# Altium PCB Micromouse_PCB_Final.PcbDoc (part 2 of 2)
Units mm, origin at the board's own origin, x right, y up, seen from the top; angles counter-clockwise.
Board outline 84.99 x 89.99 mm, 4 copper layers (Top Layer, Mid Layer (GND), Mid Layer (PWR), Bottom Layer), stack 1.591 mm thick; 98 components, 75 nets, 333 pads, 159 vias.
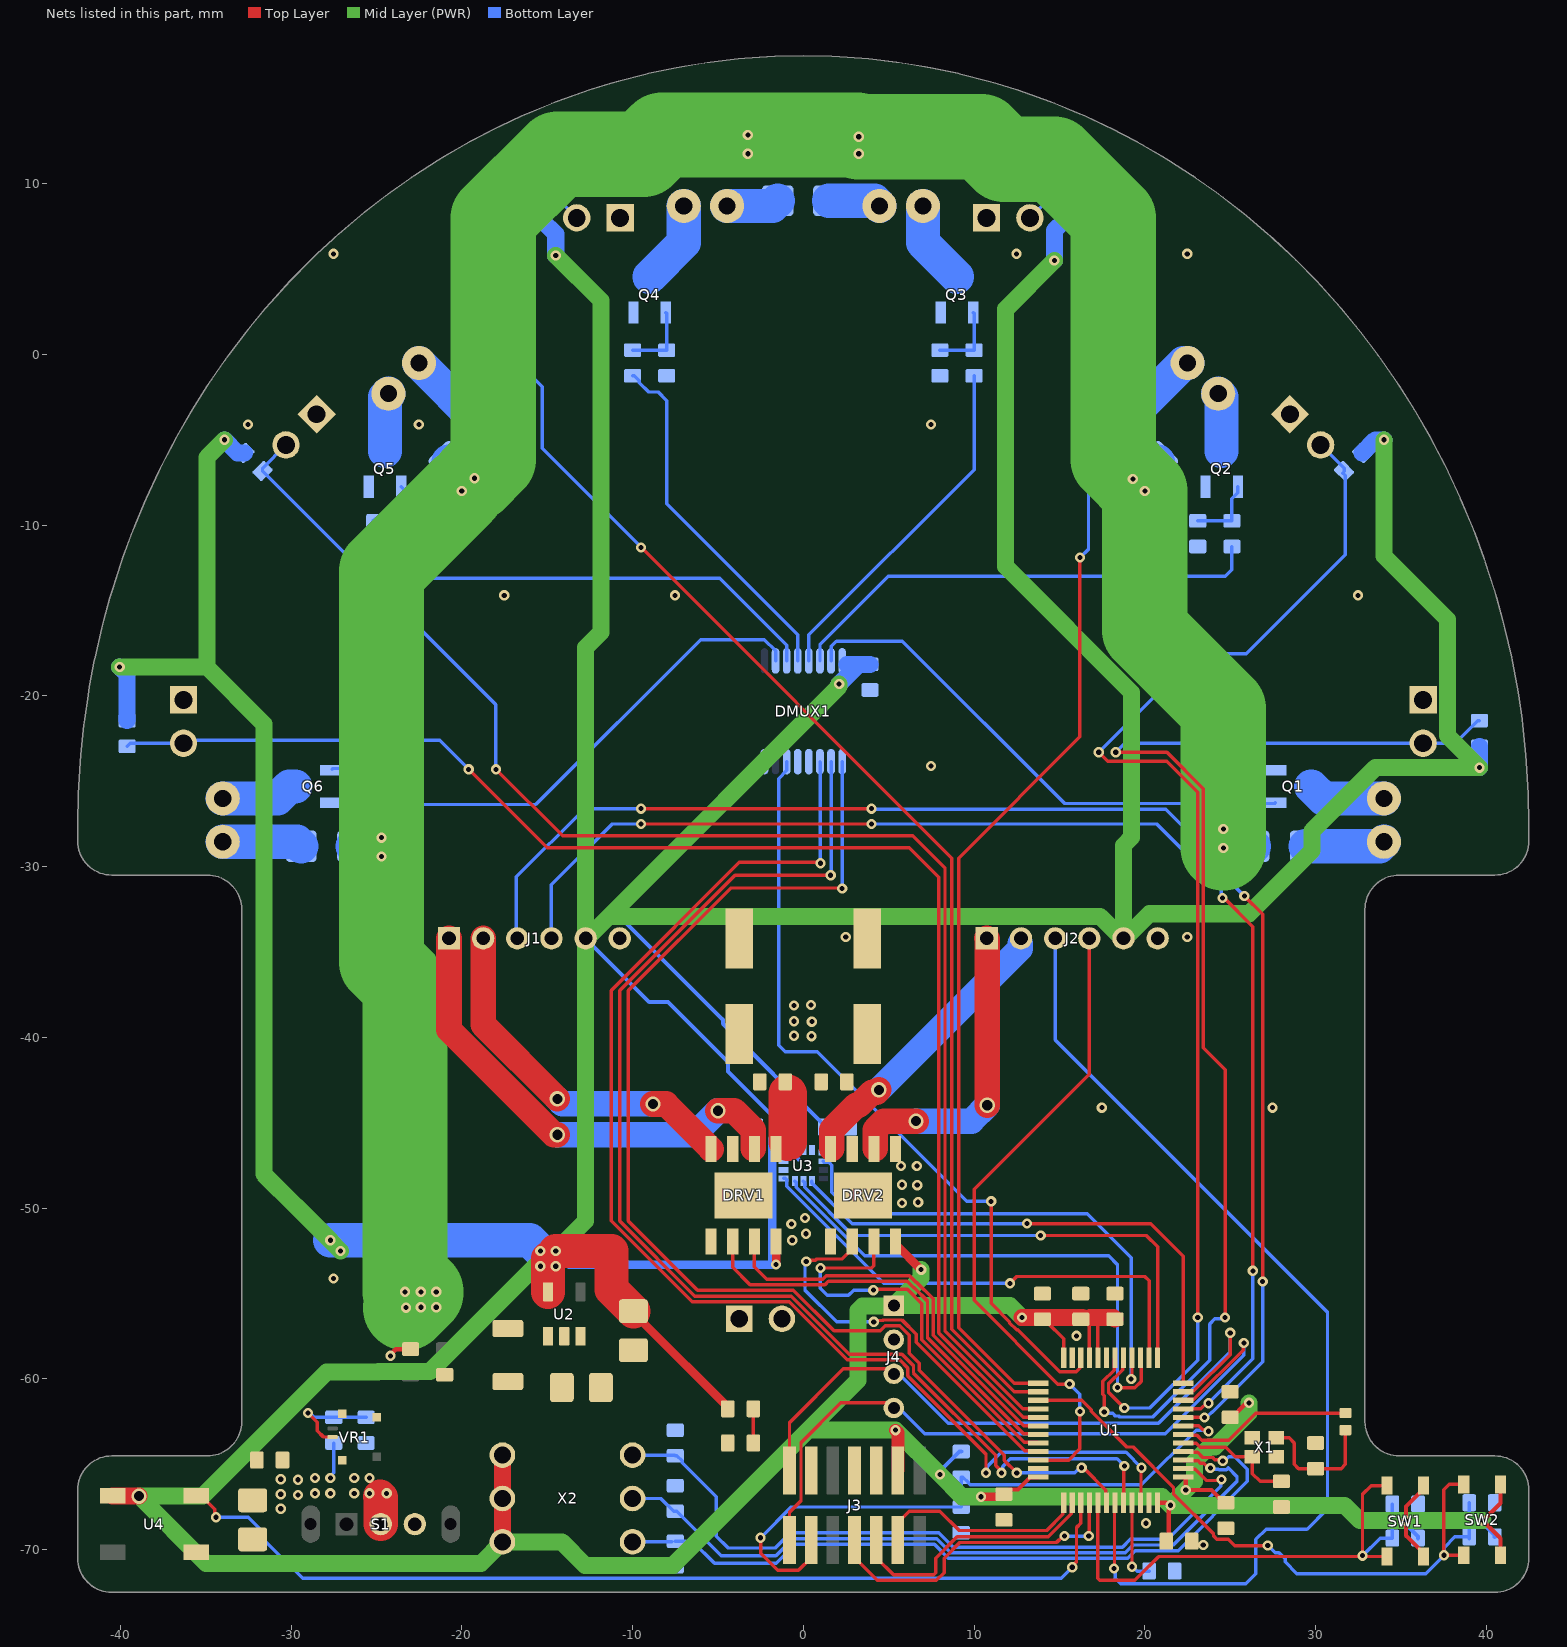
[diagram p4: the nets of this part, all layers, seen from the top]

## Via types
v1: diameter 0.6, hole 0.3, Top Layer to Bottom Layer, tented both sides, 151 vias
v2: diameter 0.9, hole 0.6, Top Layer to Bottom Layer, tented both sides, 8 vias

## Nets (pads, with @x,y where several pads share a name; then routed paths per layer and width w, separated by ;. In a path a pad name is that pad's centre, name@x,y a point inside that pad or via, vN(x,y) a via of type N, cw(c..) or ccw(c..) an arc to the next point about the centre after c; other vN are vias at no path point) (continued)
+3v3: C1.2 C2.2 C3.2 C4.2 C5.2 C6.2 C7.2 C15.2 C16.2 C21.1 C22.1 C23.1 C24.1 DMUX1.16 DRV1.4 DRV2.4 J1.5 J2.5 J3.3 J4.1 R3.1 R8.2 R27.2 R28.2 R29.2 R30.2 R31.2 R32.2 SW1.B1 SW1.B2 SW2.B1 SW2.B2 U1.1 U1.20 U1.21 U1.24 U1.36 U1.48 U2.5 U3.5 U3.8 U4.1 X2.1 X2.3 X2.5 | length 565.6
  Top Layer w0.2: v1(12.8,-56.4) 12.817,-56.4 13.117,-56.7 14.3,-56.7 15.25,-57.65 U1.24@15.25,-58.75 ; C3.2@16.35,-56.5 16.75,-56.9 U1.21@16.75,-58.75 ; 16.8,-56.4 17.25,-56.85 U1.20@17.25,-58.75
  Top Layer w0.25: C5.2@11.75,-66.75 12.025,-66.475 12.575,-66.475 13.3,-65.75 U1.36@13.75,-65.75 ; U1.48@20.75,-67.25 21.255,-67.25 21.405,-67.4 v1(21.5,-67.4) 21.433,-67.467 21.433,-67.688 21.4,-67.721 21.4,-69.35 C6.2@21.25,-69.5 ; U1.1@22.25,-65.75 22.375,-65.75 22.4,-65.775 v1(22.4,-66.5) 23.9,-66.5 24.65,-67.25 C7.2@24.75,-67.25 ; C1.2@25,-62.25 25.1,-62.25 25.883,-61.467 26.033,-61.467 v1(26.1,-61.4) ; SW1.B1@36.325,-70.4 36.325,-70.2 35.3,-69.175 v1(35.3,-68.3) 35.3,-67.475 36.325,-66.45 SW1.B2@36.325,-66.25 ; SW2.B1@40.825,-70.325 40.825,-69.325 v1(39.8,-68.3) 40.825,-67.275 SW2.B2@40.825,-66.175
  Top Layer w0.5: C15.2@-9.95,-56.032 -9.8,-56.032 -9.35,-56.482 -9.35,-56.725 -4.425,-61.65 R8.2@-4.425,-61.75 ; v1(-1.6,-53.3) -1.595,-53.295 DRV1.4@-1.595,-51.962 ; DRV2.4@5.405,-51.962 5.405,-52.105 v1(6.9,-53.6) ; v1(10.4,-66.9) 11.6,-66.9 C5.2@11.75,-66.75
  Top Layer w0.75: v1(5.4,-63) 5.54,-63.14 J3.3@5.54,-65.365
  Top Layer w1: U4.1@-40.44,-66.86 v2(-38.906,-66.86) ; X2.5@-17.62,-69.54 X2.3@-17.62,-67 X2.1@-17.62,-64.46 ; -14.95,-52.95 -14.757,-52.757 ; v1@12.817,-56.4 C3.2@16.35,-56.4 ; 16.8,-56.4 18.15,-56.4 C4.2@18.25,-56.5
  Top Layer w2: U2.5@-14.95,-54.9 -14.95,-52.95 ; v1(-14.5,-52.5) -11.225,-52.5 -11.225,-54.757 C15.2@-9.95,-56.032
  Mid Layer (PWR) w1: v1(-40.036,-18.303) -34.928,-18.303 ; v1(-33.9,-5) -34.928,-6.028 -34.928,-18.303 ; v1(-27.1,-52.5) -27.7,-51.9 v1(-27.7,-51.875) -29.634,-49.941 -29.659,-49.941 -31.593,-48.007 -31.593,-21.638 -34.928,-18.303 ; v1(-15.4,-53.4) -15.7,-53.4 -21.873,-59.573 -24.884,-59.573 -24.909,-59.598 -27.909,-59.598 -35.171,-66.86 v2(-38.906,-66.86) -34.966,-70.8 -18.88,-70.8 X2.5@-17.62,-69.54 -14.146,-69.54 -12.769,-70.917 -7.643,-70.917 0.274,-63 ; v1(-14.5,-52.5) -12.75,-50.75 J1.5@-12.75,-34.2 ; v1(-14.5,5.8) -11.85,3.15 -11.85,-16.272 -12.75,-17.172 J1.5@-12.75,-34.2 ; v1(2.1,-19.3) 2.1,-19.433 -11.386,-32.919 ; v1(6.9,-53.6) 6.9,-54.1 J4.1@5.3,-55.7 ; v1(12.8,-56.4) 12.1,-55.7 J4.1@5.3,-55.7 ; v1(14.7,5.5) 11.85,2.65 11.85,-12.422 19.227,-19.799 19.227,-28.278 18.75,-28.755 J2.5@18.75,-34.2 ; v1(26.1,-61.4) 26.1,-62 24.114,-63.986 23.751,-63.986 22.909,-64.828 22.909,-65.991 v1(22.4,-66.5) v1(21.5,-67.4) ; v1(34,-5) 34,-11.8 37.727,-15.527 37.727,-22.327 v1(39.6,-24.2) 33.499,-24.2 29.799,-27.9 29.799,-29.054 26.099,-32.754 20.279,-32.754 18.833,-34.2 J2.5@18.75,-34.2 ; v1(39.8,-68.3) v1(35.3,-68.3) 32.6,-68.3 31.7,-67.4 v1(21.5,-67.4) ; J1.5@-12.75,-34.2 -12.667,-34.2 -11.386,-32.919 ; -11.386,-32.919 17.386,-32.919 18.667,-34.2 J2.5@18.75,-34.2 ; 0.274,-63 v1(5.4,-63) v1(8,-65.6) 9.3,-66.9 v1(10.4,-66.9) 21,-66.9 v1(21.5,-67.4) ; 0.274,-63 3.2,-60.074 3.2,-55.993 3.466,-55.727 5.273,-55.727 J4.1@5.3,-55.7
  Bottom Layer w0.25: C22.1@-1.25,-45.35 -0.975,-45.625 -0.875,-45.625 -0.5,-46 U3.5@-0.5,-46.587 -0.45,-46.637 -0.45,-46.956 -0.279,-47.127 ; C22.1@-1.25,-45.25 -1.25,-45.15 -4.407,-41.993 -4.407,-41.44 -7.926,-37.921 -9.029,-37.921 J1.5@-12.75,-34.2 -11.844,-33.294 -10.375,-33.294 -4.7,-38.969 -4.7,-39.2 1.25,-45.15 C21.1@1.25,-45.25 1.162,-45.338 U3.8@1.162,-46.75 ; v1(8,-65.6) 8.067,-65.533 8.067,-65.333 9.15,-64.25 R3.1@9.25,-64.25 ; v1(35.3,-68.3) 35.367,-68.367 35.367,-68.592 36,-69.225 C23.1@36,-69.325 ; v1(39.8,-68.3) 39.867,-68.367 39.867,-68.517 40.5,-69.15 C24.1@40.5,-69.25
  Bottom Layer w0.5: v1(-14.5,-52.5) -13.7,-53.3 v1(-1.6,-53.3) -1.6,-53.273 -1.827,-53.046 -1.827,-45.927 C22.1@-1.25,-45.35
  Bottom Layer w1: v1(-40.036,-18.303) -39.6,-18.739 R32.2@-39.6,-21.45 ; v1(-33.9,-5) -33.13,-5.77 R31.2@-32.73,-5.77 ; R30.2@-15.3,7.85 -14.5,7.05 v1(-14.5,5.8) ; v1(2.1,-19.3) 3.25,-18.15 ; 2.55,-18.15 3.25,-18.15 ; C16.2@3.9,-18.15 3.25,-18.15 ; v1(14.7,5.5) 14.7,7.25 R29.2@15.3,7.85 ; R28.2@32.73,-5.77 33.5,-5 v1(34,-5) ; v1(39.6,-24.2) R27.2@39.6,-22.95
  Bottom Layer w2: v1(-27.7,-51.875) -16.025,-51.875 -15,-52.9
  other v1: -14.5,-53.4 -15.4,-52.5
+5v: C13.2 C14.2 R6.2 R9.2 R12.2 R15.2 R18.2 R21.2 R24.2 U2.1 U2.3 VR1.3 | length 157.4
  Mid Layer (PWR) w5: v1(-23.275,-55.825) -22.4,-54.95 v1(-22.4,-54.9) ; -22.863,-55.363 v1(-23.325,-54.9) -23.325,-36.956 -24.7,-35.581 v1(-24.7,-28.3) -24.7,-12.7 v1(-20,-8) ; v1(-19.25,-7.25) -18.15,-6.15 -18.15,7.967 -14.392,11.725 -9.383,11.725 -8.258,12.85 3.15,12.85 v1(3.25,12.75) 10.435,12.75 11.758,11.427 14.69,11.427 18.15,7.967 18.15,-6.15 v1(20,-8) 20,-16.15 24.6,-20.75 v1(24.6,-28.9)
  Bottom Layer w2: R24.2@-26.4,-28.8 -24.7,-28.8 ; R21.2@-20.761,-6.261 -19.521,-7.5 -19.5,-7.5 ; -3.3,12.2 -3.1,12 R18.2@-1.5,12 ; R15.2@1.5,12 2.9,12 3.1,12.2 ; 19.7,-7.6 19.7,-7.321 R12.2@20.761,-6.261 ; 24.9,-28.3 25.4,-28.8 R9.2@26.4,-28.8
  other v1: -22.4,-55.8 -21.5,-55.8 -21.5,-54.9 -24.7,-29.4 24.6,-27.8 19.3,-7.3 -3.25,11.75 3.25,11.75 -3.25,12.85
A_1: IR1.2 R9.1 | length 4.7
  Bottom Layer w2: R9.1@29.4,-28.8 33.74,-28.8 IR1.2@34,-28.54
A_2: IR2.2 R12.1 | length 5.4
  Bottom Layer w2: R12.1@18.639,-4.139 22.275,-0.504 IR2.2@22.504,-0.504
A_3: IR3.2 R15.1 | length 3.1
  Bottom Layer w2: R15.1@1.5,9 4.16,9 IR3.2@4.46,8.7
A_4: IR4.2 R18.1 | length 3.1
  Bottom Layer w2: IR4.2@-4.46,8.7 -1.8,8.7 R18.1@-1.5,9
A_5: IR5.2 R21.1 | length 5.4
  Bottom Layer w2: IR5.2@-22.504,-0.504 -18.869,-4.139 R21.1@-18.639,-4.139
A_6: IR6.2 R24.1 | length 4.7
  Bottom Layer w2: IR6.2@-34,-28.54 -29.66,-28.54 R24.1@-29.4,-28.8
BTN_1: C23.2 R36.2 SW1.A1 SW1.A2 U1.41 | length 31.4
  Top Layer w0.2: U1.41@17.25,-67.25 17.25,-71.683 17.367,-71.8 19.4,-71.8 19.633,-71.567 20.8,-70.4 SW1.A1@34.175,-70.4 ; v1(32.75,-70.35) 32.75,-66.75 33.25,-66.25 SW1.A2@34.175,-66.25
  Bottom Layer w0.2: v1(32.75,-70.35) 33.775,-69.325 C23.2@34.5,-69.325 R36.2@34.5,-67.325
BTN_2: C24.2 R37.2 SW2.A1 SW2.A2 U1.27 | length 39.5
  Top Layer w0.2: U1.27@13.75,-61.25 16.295,-61.25 16.851,-61.806 16.851,-61.896 18.942,-63.987 19.332,-63.987 21.678,-66.332 21.678,-66.723 24.023,-69.068 24.023,-69.185 24.215,-69.377 24.877,-69.377 25.275,-69.775 27.175,-69.775 v1(27.2,-69.75) ; SW2.A1@38.675,-70.325 v1(37.525,-70.325) 37.5,-70.3 37.5,-66.5 37.825,-66.175 SW2.A2@38.675,-66.175
  Bottom Layer w0.2: v1(27.2,-69.75) 27.632,-70.182 27.857,-70.182 28.213,-70.538 28.213,-70.713 28.9,-71.4 36.45,-71.4 v1(37.525,-70.325) 37.525,-69.875 38.15,-69.25 C24.2@39,-69.25 ; C24.2@39,-69.35 R37.2@39,-67.25
DIP_1: R35.2 U1.2 X2.2 | length 43.3
  Top Layer w0.2: U1.2@22.25,-65.25 22.3,-65.3 22.955,-65.3 23.6,-65.945 24.437,-65.945 v1(24.497,-65.885)
  Bottom Layer w0.2: X2.2@-10,-64.46 -7.54,-64.46 R35.2@-7.5,-64.5 -7.4,-64.5 -7.1,-64.8 -7.1,-64.9 -5.1,-66.9 -5.1,-69.2 -4.4,-69.9 -1.65,-69.9 -0.75,-69 7.925,-69 8.771,-69.846 18.692,-69.846 19.141,-69.397 21.353,-69.397 24.456,-66.294 24.456,-65.925 v1(24.497,-65.885)
DIP_2: R34.2 U1.3 X2.4 | length 43.2
  Top Layer w0.2: U1.3@22.25,-64.75 22.3,-64.8 23.125,-64.8 23.252,-64.927 23.443,-64.927 23.728,-65.212 v1(23.836,-65.212)
  Bottom Layer w0.2: X2.4@-10,-67 -8.35,-67 -7.6,-67.75 R34.2@-7.5,-67.75 -7.4,-67.75 -4.8,-70.35 -1.6,-70.35 -0.606,-69.356 7.819,-69.356 8.635,-70.173 18.865,-70.173 19.314,-69.724 21.676,-69.724 25.4,-66 25.4,-65.717 24.895,-65.212 24.783,-65.324 24.346,-65.324 24.311,-65.288 23.913,-65.288 v1(23.836,-65.212)
DIP_3: R33.2 U1.4 X2.6 | length 44.1
  Top Layer w0.2: U1.4@22.25,-64.25 22.3,-64.3 23.088,-64.3 23.388,-64.6 23.97,-64.6 24.09,-64.72 24.488,-64.72 v1(24.564,-64.797)
  Bottom Layer w0.2: X2.6@-10,-69.54 -9.995,-69.545 R33.2@-7.705,-69.545 ; R33.2@-7.5,-69.5 -6.5,-69.5 -5.2,-70.8 -1.588,-70.8 -0.471,-69.683 7.683,-69.683 8.5,-70.5 19,-70.5 19.449,-70.051 21.949,-70.051 26,-66 26,-65.3 25.264,-64.564 24.905,-64.564 24.673,-64.797 v1(24.564,-64.797)
DMUX_A0: DMUX1.1 U1.42 | length 72.7
  Top Layer w0.2: v1(2.275,-31.275) 2.25,-31.25 -4.25,-31.25 -10.25,-37.25 -10.25,-50.75 -6.196,-54.804 -0.579,-54.804 1.798,-57.181 4.502,-57.181 4.81,-56.873 5.643,-56.873 6.2,-57.43 6.2,-58.506 6.781,-59.087 6.781,-59.481 11.777,-64.477 11.777,-64.777 v1(12.5,-65.5) ; v1(16.3,-65.2) 16.408,-65.2 17.717,-66.509 17.717,-67.217 U1.42@17.75,-67.25
  Bottom Layer w0.2: v1(2.275,-31.275) DMUX1.1@2.275,-23.85 ; v1(12.5,-65.5) 15.892,-65.5 16.192,-65.2 v1(16.3,-65.2)
DMUX_A1: DMUX1.2 U1.44 | length 74.5
  Top Layer w0.2: v1(1.6,-30.5) -4,-30.5 -10.75,-37.25 -10.75,-50.75 -6.354,-55.146 -0.7,-55.146 2.7,-58.546 5.778,-58.546 6.454,-59.222 6.454,-59.654 11.277,-64.477 11.277,-65.069 11.6,-65.392 v1(11.6,-65.5) ; U1.44@18.75,-67.25 18.775,-67.225 18.775,-65.125 v1(18.8,-65.1)
  Bottom Layer w0.2: v1(1.6,-30.5) 1.625,-30.475 DMUX1.2@1.625,-23.85 ; v1(11.6,-65.5) 11.674,-65.426 11.674,-65.126 12.127,-64.673 18.373,-64.673 v1(18.8,-65.1)
DMUX_A2: DMUX1.3 U1.46 | length 76
  Top Layer w0.2: v1(1,-29.8) 0.95,-29.75 -3.75,-29.75 -11.25,-37.25 -11.25,-50.74 -6.517,-55.473 -0.835,-55.473 2.565,-58.873 5.211,-58.873 5.643,-58.873 6.127,-59.357 6.127,-59.752 6.127,-59.789 6.127,-59.827 10.7,-64.4 v1(10.7,-65.5) ; U1.46@19.75,-67.25 19.775,-67.225 19.775,-65.225 v1(19.8,-65.2)
  Bottom Layer w0.2: DMUX1.3@0.975,-23.85 1,-23.875 v1(1,-29.8) ; v1(10.7,-65.5) 10.774,-65.426 10.774,-65.126 11.6,-64.3 18.9,-64.3 v1(19.8,-65.2)
DMUX_EN: DMUX1.6 U1.22 | length 46.6
  Top Layer w0.2: v1(11,-49.6) 11,-55.571 12.073,-56.644 12.073,-56.701 12.499,-57.127 12.556,-57.127 15.006,-59.577 15.994,-59.577 16.2,-59.371 16.2,-58.8 U1.22@16.25,-58.75
  Bottom Layer w0.2: DMUX1.6@-0.975,-23.85 -0.975,-24.364 -1.45,-24.839 -1.45,-40.453 -1.053,-40.85 0.825,-40.85 9.575,-49.6 v1(11,-49.6)
E_A_L: J1.3 U1.8 | length 84
  Top Layer w0.2: v1(-9.5,-26.6) v1(4,-26.6) ; U1.8@22.25,-62.25 22.252,-62.252 23.499,-62.252 v1(23.501,-62.255) ; v1(25.827,-31.715) 26.9,-32.788 v1(26.9,-54.3)
  Bottom Layer w0.2: J1.3@-16.75,-34.2 -16.8,-34.15 -16.8,-30.6 -12.8,-26.6 v1(-9.5,-26.6) ; v1(4,-26.6) 4.027,-26.627 21.227,-26.627 23.489,-28.889 23.489,-29.377 v1(25.827,-31.715) ; v1(23.501,-62.255) 23.61,-62.255 23.915,-61.95 23.941,-61.95 26.9,-58.991 v1(26.9,-54.3)
E_A_R: J2.3 U1.43 | length 60
  Top Layer w0.2: v1(18.2,-71.1) 18.225,-71.075 18.225,-67.275 U1.43@18.25,-67.25
  Bottom Layer w0.2: J2.3@14.75,-34.2 14.75,-40.15 30.7,-56.1 30.7,-67.6 29.5,-68.8 27.1,-68.8 26.5,-69.4 26.5,-71.4 25.9,-72 18.6,-72 18.277,-71.677 18.277,-71.177 v1(18.2,-71.1)
E_B_L: J1.4 U1.9 | length 79.1
  Top Layer w0.2: v1(-9.5,-27.5) v1(4,-27.5) ; U1.9@22.25,-61.75 23.287,-61.75 23.614,-61.423 v1(23.723,-61.423) ; v1(24.55,-31.827) 24.637,-31.827 26.327,-33.517 v1(26.327,-53.67)
  Bottom Layer w0.2: J1.4@-14.75,-34.2 -14.75,-31.05 -11.2,-27.5 v1(-9.5,-27.5) ; v1(4,-27.5) 20.7,-27.5 24.473,-31.273 24.473,-31.75 v1(24.55,-31.827) ; v1(23.723,-61.423) 26.327,-58.818 v1(26.327,-53.67)
E_B_R: J2.4 U1.34 | length 38.4
  Top Layer w0.2: U1.34@13.75,-64.75 15.55,-64.75 16.2,-64.1 v1(16.2,-61.9) ; v1(15.6,-60.3) 14.9,-60.3 10,-55.4 10,-48.9 16.75,-42.15 J2.4@16.75,-34.2
  Bottom Layer w0.2: v1(15.6,-60.3) 16.2,-60.9 v1(16.2,-61.9)
G_1: Q1.1 R10.2 R11.2 | length 4.5
  Bottom Layer w0.2: R11.2@25.15,-24.3 R10.2@25.15,-26.3 27.6,-26.3 Q1.1@27.65,-26.25
G_2: Q2.1 R13.2 R14.2 | length 4.1
  Bottom Layer w0.2: R14.2@23.1,-9.75 R13.2@25.1,-9.75 25.1,-8.45 25.45,-8.1 Q2.1@25.45,-7.75
G_3: Q3.1 R16.2 R17.2 | length 4.2
  Bottom Layer w0.2: R17.2@8,0.25 R16.2@10,0.25 10,2.4 Q3.1@9.95,2.45
G_4: Q4.1 R19.2 R20.2 | length 4.2
  Bottom Layer w0.2: R19.2@-10,0.25 R20.2@-8,0.25 -8,2.4 Q4.1@-8.05,2.45
G_5: Q5.1 R22.2 R23.2 | length 4.6
  Bottom Layer w0.2: R22.2@-25.2,-9.75 -25.1,-9.65 R23.2@-22.8,-9.65 ; Q5.1@-23.55,-7.75 -23.35,-7.95 -23.35,-8.681 -22.9,-9.131 R23.2@-22.9,-9.65
G_6: Q6.1 R25.2 R26.2 | length 4.5
  Bottom Layer w0.2: Q6.1@-27.6,-24.3 -27.55,-24.25 -25.15,-24.25 R25.2@-25.15,-26.25
GND: C1.1 C2.1 C3.1 C4.1 C5.1 C6.1 C7.1 C8.1 C9.1 C10.2 C11.1 C12.1 C13.1 C14.1 C15.1 C16.1 C17.2 C18.2 C19.1 C20.1 C21.2 C22.2 D1.1 D2.1 D3.1 D4.1 D5.1 D6.1 D7.K DMUX1.4 DMUX1.5 DMUX1.8 DRV1.1 DRV1.7 DRV1.9 DRV2.1 DRV2.7 DRV2.9 J1.6 J2.6 J3.5 J3.7 J3.11 J4.2 J5.2 Q1.2 Q2.2 Q3.2 Q4.2 Q5.2 Q6.2 R2.1 R5.1 R7.1 R11.1 R14.1 R17.1 R20.1 R23.1 R26.1 R33.1 R34.1 R35.1 R36.1 R37.1 U1.19 U1.23 U1.35 U1.47 U2.2 U3.2 U3.3 U3.6 U3.7 U4.3 VR1.4 X1.2 X1.4 | length 1.4
  Top Layer w0.25: v1(-24.175,-58.646) -24.175,-58.571 -23.867,-58.262 -23.012,-58.262 R7.1@-23,-58.25
  other v1: 23.425,-69.725 20.075,-68.45 16,-57.475 -27.518,-54.11 17.482,-44.11 27.482,-44.11 2.482,-34.11 22.482,-34.11 7.482,-24.11 -17.518,-14.11 -7.518,-14.11 32.482,-14.11 -32.518,-4.11 -22.518,-4.11 7.482,-4.11 -27.518,5.89 12.482,5.89 22.482,5.89
IMU_CS: U1.12 U3.12 | length 31.1
  Top Layer w0.2: v1(13.1,-50.9) 16.1,-50.9 20.345,-50.9 22.25,-52.805 U1.12@22.25,-60.25
  Bottom Layer w0.2: U3.12@0.5,-48.412 0.5,-48.525 2.875,-50.9 v1(13.1,-50.9)
IMU_INT2: U1.16 U3.9 | length 29.7
  Top Layer w0.2: v1(19.2,-60) 19.25,-59.95 U1.16@19.25,-58.75
  Bottom Layer w0.2: U3.9@1.162,-47.25 1.238,-47.325 1.521,-47.325 1.677,-47.481 1.677,-49.077 2.927,-50.327 16.627,-50.327 19.2,-52.9 v1(19.2,-60)
IMU_MISO: U1.14 U3.1 | length 29
  Top Layer w0.2: v1(12.1,-54.4) 12.1,-54.395 12.495,-54 20,-54 20.25,-54.25 U1.14@20.25,-58.75
  Bottom Layer w0.2: U3.1@-1.162,-48.25 -1.05,-48.25 -0.975,-48.325 -0.975,-48.721 4.704,-54.4 v1(12.1,-54.4)
IMU_MOSI: U1.15 U3.14 | length 31.3
  Top Layer w0.2: v1(18.4,-60.5) 18.427,-60.527 19.418,-60.527 19.795,-60.15 19.795,-58.795 U1.15@19.75,-58.75
  Bottom Layer w0.2: U3.14@-0.5,-48.412 -0.425,-48.488 -0.425,-48.771 3.589,-52.786 17.886,-52.786 18.4,-53.3 v1(18.4,-60.5)
IMU_SCK: U1.13 U3.13 | length 29
  Top Layer w0.2: v1(13.9,-51.6) 20.092,-51.6 20.75,-52.258 U1.13@20.75,-58.75
  Bottom Layer w0.2: U3.13@0,-48.412 0.075,-48.488 0.075,-48.771 2.904,-51.6 v1(13.9,-51.6)
IN_1_L: DRV1.3 U1.30 | length 23.4
  Top Layer w0.2: DRV1.3@-2.865,-51.962 -2.865,-53.435 -2.15,-54.15 1.133,-54.15 1.337,-53.946 6.218,-53.946 6.599,-54.327 6.627,-54.327 7.6,-55.3 7.6,-57.443 12.907,-62.75 U1.30@13.75,-62.75
IN_1_R: DRV2.3 U1.32 | length 23.8
  Top Layer w0.2: v1(1,-53.5) 4,-53.5 4.135,-53.365 DRV2.3@4.135,-51.962 ; v1(4.1,-54.8) 4.146,-54.754 6.1,-54.754 6.946,-55.6 6.946,-57.714 12.932,-63.7 13.7,-63.7 U1.32@13.75,-63.75
  Bottom Layer w0.2: v1(1,-53.5) 1,-54.7 1.4,-55.1 2.646,-55.1 2.946,-54.8 v1(4.1,-54.8)
IN_2_L: DRV1.2 U1.31 | length 24.9
  Top Layer w0.2: DRV1.2@-4.135,-51.962 -4.135,-53.465 -3.123,-54.477 1.269,-54.477 1.473,-54.273 6.082,-54.273 6.463,-54.654 6.492,-54.654 7.273,-55.435 7.273,-57.579 12.894,-63.2 13.7,-63.2 U1.31@13.75,-63.25
IN_2_R: DRV2.2 U1.33 | length 23.1
  Top Layer w0.2: v1(0.172,-53.117) 0.249,-53.04 0.715,-53.04 0.782,-52.973 2.292,-52.973 2.865,-52.4 DRV2.2@2.865,-51.962 ; v1(4.127,-56.654) 4.204,-56.577 4.643,-56.577 4.675,-56.546 5.778,-56.546 6.619,-57.387 6.619,-57.849 12.97,-64.2 13.7,-64.2 U1.33@13.75,-64.25
  Bottom Layer w0.2: v1(0.172,-53.117) 0.1,-53.189 0.1,-54.8 1.954,-56.654 v1(4.127,-56.654)
IR_EM_1: DMUX1.15 R10.1 | length 26.9
  Bottom Layer w0.2: DMUX1.15@1.625,-17.95 1.642,-17.933 1.642,-17.099 1.941,-16.8 5.8,-16.8 15.3,-26.3 R10.1@23.65,-26.3
IR_EM_2: DMUX1.14 R13.1 | length 28.2
  Bottom Layer w0.2: DMUX1.14@0.975,-17.95 0.975,-17.002 4.977,-13 24.7,-13 25.1,-12.6 R13.1@25.1,-11.25
IR_EM_3: DMUX1.13 R16.1 | length 20.7
  Bottom Layer w0.2: DMUX1.13@0.325,-17.95 0.325,-16.425 10,-6.75 R16.1@10,-1.25
IR_EM_4: DMUX1.12 R19.1 | length 21.1
  Bottom Layer w0.2: R19.1@-10,-1.25 -9.9,-1.25 -9.6,-1.55 -9.6,-1.65 -9.05,-2.2 -8.5,-2.2 -8,-2.7 -8,-8.75 -0.325,-16.425 DMUX1.12@-0.325,-17.95
IR_EM_5: DMUX1.11 R22.1 | length 28.2
  Bottom Layer w0.2: R22.1@-25.2,-11.25 -25.1,-11.35 -25.1,-12.5 -24.5,-13.1 -4.9,-13.1 -0.975,-17.025 DMUX1.11@-0.975,-17.95
IR_EM_6: DMUX1.10 R25.1 | length 26.9
  Bottom Layer w0.2: R25.1@-23.65,-26.25 -23.544,-26.356 -15.656,-26.356 -6,-16.7 -2.291,-16.7 -1.625,-17.366 DMUX1.10@-1.625,-17.95
IR_REC_1: D1.2 R27.1 U1.18 | length 73.9
  Top Layer w0.2: v1(17.625,-61.925) 17.625,-60.987 17.546,-60.908 17.546,-60.146 18.2,-59.492 18.2,-58.8 U1.18@18.25,-58.75 ; v1(18.3,-23.3) 21.3,-23.3 23.427,-25.427 23.427,-40.615 24.7,-41.888 v1(24.7,-56.4)
  Bottom Layer w0.2: v1(17.625,-61.925) 17.702,-62.002 18.11,-62.002 18.278,-62.17 18.47,-62.17 18.527,-62.227 20.473,-62.227 23.8,-58.9 23.8,-56.783 24.106,-56.477 24.623,-56.477 v1(24.7,-56.4) ; v1(18.3,-23.3) 18.83,-22.77 36.17,-22.77 D1.2@36.235,-22.835 ; D1.2@36.3,-22.77 38.18,-22.77 39.5,-21.45 R27.1@39.6,-21.45
IR_REC_2: D2.2 R28.1 U1.17 | length 75.3
  Top Layer w0.2: v1(17.3,-23.3) 17.827,-23.827 21.282,-23.827 23.1,-25.645 v1(23.1,-56.4) ; U1.17@18.75,-58.75 18.7,-58.8 18.7,-59.455 17.873,-60.282 17.873,-60.773 v1(18.8,-61.7)
  Bottom Layer w0.2: v1(17.3,-23.3) 23.075,-17.525 25.93,-17.525 31.729,-11.726 31.729,-7.337 31.74,-7.325 31.74,-7.089 R28.1@31.6,-6.948 ; v1(18.8,-61.7) 20.3,-61.7 23.1,-58.9 v1(23.1,-56.4) ; D2.2@30.298,-5.298 31.67,-6.67 R28.1@31.67,-6.83
IR_REC_3: D3.2 R29.1 U1.25 | length 78.5
  Top Layer w0.2: U1.25@13.75,-60.25 12.35,-60.25 9.1,-57 9.1,-29.5 16.2,-22.4 v1(16.2,-11.9)
  Bottom Layer w0.2: D3.2@13.27,8 14.42,9.15 15.1,9.15 R29.1@15.3,9.35 ; R29.1@15.568,9.232 15.568,9.182 15.7,9.05 15.75,9.05 16.7,8.1 16.7,-11.4 v1(16.2,-11.9)
IR_REC_4: D4.2 R30.1 U1.26 | length 86.4
  Top Layer w0.2: v1(-9.5,-11.3) 8.7,-29.5 8.7,-57.1 12.35,-60.75 U1.26@13.75,-60.75
  Bottom Layer w0.2: D4.2@-13.27,8 -14.42,9.15 -15.1,9.15 R30.1@-15.3,9.35 -15.4,9.35 -15.7,9.05 -15.7,8.95 -16.3,8.35 -16.3,-0.9 -15.3,-1.9 -15.3,-5.5 -15.241,-5.559 v1(-9.5,-11.3)
IR_REC_5: D5.2 R31.1 U1.28 | length 88.4
  Top Layer w0.2: v1(-18,-24.3) -14.1,-28.2 6.4,-28.2 8.3,-30.1 8.3,-57.2 12.85,-61.75 U1.28@13.75,-61.75
  Bottom Layer w0.2: D5.2@-30.298,-5.298 -31.67,-6.67 R31.1@-31.67,-6.83 -18,-20.5 v1(-18,-24.3)
IR_REC_6: D6.2 R32.1 U1.29 | length 85.5
  Top Layer w0.2: v1(-19.6,-24.3) -15,-28.9 6.2,-28.9 7.927,-30.627 7.927,-57.308 12.869,-62.25 U1.29@13.75,-62.25
  Bottom Layer w0.2: R32.1@-39.6,-22.95 -39.42,-22.77 D6.2@-36.3,-22.77 -36.13,-22.6 -21.3,-22.6 v1(-19.6,-24.3)
K_1: IR1.1 Q1.3 | length 4.5
  Bottom Layer w2: Q1.3@29.75,-25.3 30.45,-26 IR1.1@34,-26
K_2: IR2.1 Q2.3 | length 3.4
  Bottom Layer w2: IR2.1@24.3,-2.3 24.5,-2.5 Q2.3@24.5,-5.65
K_3: IR3.1 Q3.3 | length 5
  Bottom Layer w2: IR3.1@7,8.7 7,6.55 Q3.3@9,4.55
K_4: IR4.1 Q4.3 | length 5
  Bottom Layer w2: Q4.3@-9,4.55 -7,6.55 IR4.1@-7,8.7
K_5: IR5.1 Q5.3 | length 3.4
  Bottom Layer w2: Q5.3@-24.5,-5.65 -24.5,-2.5 IR5.1@-24.3,-2.3
K_6: IR6.1 Q6.3 | length 4.5
  Bottom Layer w2: IR6.1@-34,-26 -30.8,-26 -30.1,-25.3 Q6.3@-29.75,-25.3
LED_IN: U1.39 U4.4 | length 58
  Top Layer w0.2: U4.4@-35.55,-66.85 -35.25,-66.85 -34.477,-67.623 -34.477,-68.023 v1(-34.4,-68.1) ; v1(15.75,-71.027) 15.75,-70.96 16,-70.71 16,-68.7 16.25,-68.45 U1.39@16.25,-67.25
  Bottom Layer w0.2: v1(-34.4,-68.1) -32.5,-68.1 -31.587,-69.013 -31.587,-69.413 -29.325,-71.675 15.102,-71.675 v1(15.75,-71.027)
MCU_BOOT0: R2.2 U1.45 | length 4.9
  Top Layer w0.2: v1(19.25,-71) U1.45@19.25,-67.25
  Bottom Layer w0.2: v1(19.25,-71) 19.302,-71 19.552,-71.25 R2.2@20.25,-71.25
MCU_NRST: C10.1 J3.12 R3.2 U1.7 | length 37.5
  Top Layer w0.2: v1(-2.5,-69.3) -2.5,-70.2 -1.5,-71.2 -0.28,-71.2 0.46,-70.46 J3.12@0.46,-69.435 ; U1.7@22.25,-62.75 23.15,-62.75 23.383,-62.983 23.653,-62.983 v1(23.73,-63.059)
  Bottom Layer w0.2: v1(-2.5,-69.3) -0.7,-67.5 C10.1@9.25,-67.5 R3.2@9.25,-65.75 9.35,-65.75 9.65,-66.05 9.65,-66.083 9.767,-66.2 19.8,-66.2 23,-63 23.671,-63 v1(23.73,-63.059)
MCU_OSC_IN: C8.2 U1.5 X1.1 | length 7.3
  Top Layer w0.2: U1.5@22.25,-63.75 22.262,-63.762 23.012,-63.762 23.25,-64 24.75,-64 25.3,-64.55 X1.1@26.3,-64.55 26.3,-65.55 26.75,-66 C8.2@28,-66
MCU_OSC_OUT: R1.2 U1.6 | length 10.3
  Top Layer w0.2: U1.6@22.25,-63.25 22.3,-63.3 23.055,-63.3 23.341,-63.586 24.914,-63.586 26.5,-62 R1.2@31.75,-62
MCU_SWCLK: J3.6 U1.38 | length 15.5
  Top Layer w0.2: J3.6@4.27,-69.435 4.27,-70.46 5.283,-71.473 7.633,-71.473 7.75,-71.356 7.75,-70.5 9,-69.25 14.337,-69.25 15.7,-67.887 15.7,-67.3 U1.38@15.75,-67.25
MCU_SWDIO: J3.4 U1.37 | length 12.5
  Top Layer w0.2: J3.4@5.54,-69.435 5.54,-68.41 6.2,-67.75 8,-67.75 9.127,-68.877 14.248,-68.877 15.2,-67.925 15.2,-67.3 U1.37@15.25,-67.25
MCU_SWO: J3.8 U1.40 | length 18.8
  Top Layer w0.2: J3.8@3,-69.435 3,-70.46 4.34,-71.8 7.795,-71.8 8.25,-71.345 8.25,-70.5 9.173,-69.577 14.828,-69.577 15.205,-69.2 v1(15.3,-69.2) ; v1(16.714,-69.2) 16.736,-69.178 16.736,-67.264 U1.40@16.75,-67.25
  Bottom Layer w0.2: v1(15.3,-69.2) v1(16.714,-69.2)
ON_LED: D7.A R8.1 | length 2
  Top Layer w0.2: D7.A@-2.925,-63.75 R8.1@-2.925,-61.75
OUT_1_L: DRV1.6 J1.1 | length 27.9
  Top Layer w1.5: J1.1@-20.75,-34.2 -20.75,-39.551 -14.601,-45.7 v2(-14.4,-45.7) ; v2(-5,-44.3) -4.045,-44.3 -2.933,-45.412 DRV1.6@-2.933,-46.525
  Bottom Layer w1.5: v2(-14.4,-45.7) -6.4,-45.7 v2(-5,-44.3)
OUT_1_R: DRV2.6 J2.1 | length 18.1
  Top Layer w1.5: DRV2.6@4.203,-46.525 4.203,-45.412 4.717,-44.898 6.598,-44.898 v2(6.6,-44.9) ; J2.1@10.75,-34.2 10.775,-34.225 v2(10.775,-43.975)
  Bottom Layer w1.5: v2(6.6,-44.9) 9.85,-44.9 v2(10.775,-43.975)
OUT_2_L: DRV1.8 J1.2 | length 21.4
  Top Layer w1.5: J1.2@-18.75,-34.2 -18.75,-39.25 v2(-14.4,-43.6) ; v2(-8.8,-43.9) -8.043,-43.9 DRV1.8@-5.405,-46.538
  Bottom Layer w1.5: v2(-14.4,-43.6) -14.124,-43.876 -8.824,-43.876 v2(-8.8,-43.9)
OUT_2_R: DRV2.8 J2.2 | length 16.8
  Top Layer w1.5: DRV2.8@1.663,-46.525 1.663,-45.412 3.098,-43.977 3.255,-43.977 4.032,-43.2 4.298,-43.2 v2(4.427,-43.071)
  Bottom Layer w1.5: v2(4.427,-43.071) 12.7,-34.798 J2.2@12.7,-34.5
UART_RX: J3.13 J4.3 U1.11 | length 39.4
  Top Layer w0.2: J3.13@-0.81,-65.715 -0.81,-62.56 2.35,-59.4 J4.3@5.3,-59.4 ; U1.11@22.25,-60.75 22.3,-60.7 22.871,-60.7 25,-58.571 v1(25,-57.3)
  Bottom Layer w0.2: J4.3@5.3,-59.4 8.5,-62.6 20.8,-62.6 25,-58.4 v1(25,-57.3)
UART_TX: J3.14 J4.4 U1.10 | length 41.7
  Top Layer w0.2: J3.14@-0.81,-69.785 -0.81,-67.801 -0.137,-67.128 -0.137,-63.737 2.2,-61.4 J4.4@5.3,-61.4 ; U1.10@22.25,-61.25 22.3,-61.2 22.871,-61.2 25.761,-58.31 25.761,-57.939 v1(25.8,-57.9)
  Bottom Layer w0.2: J4.4@5.3,-61.4 7.1,-63.2 21.2,-63.2 25.8,-58.6 v1(25.8,-57.9)
VBAT: C17.1 C18.1 C19.2 C20.2 DRV1.5 DRV2.5 J5.1 S1.3 | length 2.9
  Top Layer w2: -1,-43.2 -0.9,-43.3
  Top Layer w2.25: -0.9,-46.1 -0.9,-43.3
  other v1: -0.65,-51.875 0.15,-51.5 -0.7,-50.925 0.1,-50.575 5.775,-49.7 6.725,-49.65 6.675,-48.65 5.775,-48.625 5.725,-47.525 6.65,-47.525 0.475,-39.925 -0.55,-39.9 0.5,-39.075 -0.55,-39.05 -0.55,-38.125 0.45,-38.1
VBAT_SW: C11.2 C12.2 R4.2 S1.2 VR1.1 | length 4
  Top Layer w0.2: C11.2@-32.25,-67.107 C11.2@-32.157,-67.2 ; C12.2@-30.5,-64.75 C12.2@-30.488,-64.762
  Top Layer w0.5: C11.2@-32.157,-67.2 C11.2@-32.138,-67.181 ; v1@-26.327,-65.8 v1(-26.3,-65.8)
  Top Layer w2: -24.8,-66.9 -24.75,-66.95 S1.2@-24.75,-68.5
  Bottom Layer w0.2: v1(-27.7,-65.8) -27.7,-65.692 -27.5,-65.492 R4.2@-27.5,-63.75
  other v1: -30.6,-67.6 -29.6,-66.8 -30.6,-66.75 -28.6,-66.7 -27.7,-66.7 -26.3,-66.7 -25.4,-66.7 -24.4,-66.7 -29.6,-65.9 -30.6,-65.875 -28.6,-65.8 -25.4,-65.8
VDIV: R4.1 R5.2 VR1.6 | length 5.8
  Top Layer w0.2: v1(-29,-62) -28.473,-62.527 -28.473,-63.027 -28.1,-63.4 VR1.6@-27.565,-63.4
  Bottom Layer w0.2: v1(-29,-62) -28.892,-62 -28.642,-62.25 R4.1@-27.5,-62.25 R5.2@-25.6,-62.25
XTAL_IN: C9.2 R1.1 X1.3 | length 7.6
  Top Layer w0.2: X1.3@27.7,-63.45 28.45,-63.45 28.75,-63.75 28.75,-65 29,-65.25 C9.2@30,-65.25 31.5,-65.25 31.75,-65 R1.1@31.75,-63
pads on no net: DMUX1.7 DMUX1.9 J3.1 J3.2 J3.9 J3.10 S1.1 S1.SH1 S1.SH2 U2.4 U3.4 U3.10 U3.11 U4.2 VR1.2 VR1.5

## Polygon pours and split planes (outlines as drawn)
GND on Mid Layer (PWR) "GND_L03_P030" (solid, pour order 30): -56.745,23.055 -57.725,-76.85 -50.325,-84.25 52.725,-84.25 52.725,7.925 42.375,18.275
+3v3 on Mid Layer (PWR) "+3V3_L03_P021" (solid, pour order 21): -13.6,-51.8 -13.9,-51.5 -16.5,-51.5 -16.8,-51.8 -16.8,-54 -16.5,-54.3 -13.9,-54.3 -13.6,-54
VBAT on Mid Layer (PWR) "Mid Layer (PWR)-VBAT" (solid, pour order 16): 6.2,-52.5 7.6,-51.1 7.6,-47.9 6.863,-47.163 3.146,-47.163 2.125,-46.141 2.125,-38.425 1.3,-37.6 -1.6,-37.6 -2.4,-38.4 -2.4,-48.1 -7.5,-53.2 -12.3,-53.2 -23.4,-64.3 -23.4,-68.7 -23.4,-69.1 -23.1,-69.4 -22.1,-69.4 -17.8,-69.4 -9.5,-61.1 -5.771,-61.1 1,-54.329 1,-53.9 2.4,-52.5
VBAT_SW on Mid Layer (PWR) "VBAT_SW_L03_P000" (solid, pour order 0): -25.7,-69 -25.3,-69.4 -24.1,-69.4 -23.6,-68.9 -23.6,-65.92 -25.274,-63.8 -27.6,-63.8 -30.7,-63.8 -31.2,-64.3 -31.2,-67.7 -30.9,-68 -29.9,-68 -29.2,-67.3 -26.4,-67.3 -25.7,-68
GND on Top Layer "GND_L01_P028" (solid, pour order 28): -60.225,19.2 -60.225,-75.25 -48.275,-87.2 47.05,-87.2 47.05,24 -50.725,24
VBAT on Top Layer "VBAT_L01_P009" (solid, pour order 9): 5,-47.5 5.1,-47.6 5.1,-49.8 5.5,-50.2 6.9,-50.2 7.1,-50 7.1,-46.1 6.7,-45.7 5.1,-45.7 5,-45.8
VBAT on Top Layer "VBAT_L01_P008" (solid, pour order 8): 0.125,-52.475 -0.925,-52.475 -1.1,-52.3 -1.1,-51.1 -1.7,-50.5 -1.7,-47.7 -2.1,-47.3 -2.1,-45.6 -1.9,-45.4 0.2,-45.4 0.75,-45.95 0.75,-51.85
VBAT on Top Layer "VBAT_L01_P014" (solid, pour order 14): -4.9,-38.2 -4.9,-41.6 -4.5,-42 -2.1,-42 -1.9,-42.2 -1.9,-43.2 -1.3,-43.8 1.3,-43.8 1.9,-43.2 1.9,-42.1 2.1,-41.9 4.4,-41.9 4.9,-41.4 4.9,-37.7 4.4,-37.2 -3.9,-37.2
+5v on Top Layer "Top Layer-+5v" (solid, pour order 20): -26.2,-62.845 -25.945,-63.1 -20,-63.1 -18.7,-61.8 -13.6,-61.8 -12.9,-61.1 -12.9,-59.6 -12.6,-59.3 -11.8,-59.3 -11.5,-59 -11.5,-57 -14.9,-57 -17.1,-59.2 -19.1,-59.2 -19.1,-55.6 -20.3,-54.4 -24.5,-54.4 -26.2,-56.1 -26.2,-61.3
VBAT_SW on Top Layer "`" (solid, pour order 2): -33.4,-66.3 -33.4,-67.8 -33.1,-68.1 -30.2,-68.1 -29.4,-67.3 -23.9,-67.3 -23.7,-67.1 -23.7,-66.404 -26.504,-63.6 -30.4,-63.6 -31.3,-64.5 -31.3,-65.492 -31.508,-65.7 -32.8,-65.7
GND on Mid Layer (GND) "GND_L02_P029" (solid, pour order 29): 72.325,9.05 72.325,11.925 60.525,23.725 -55.525,23.725 -61.425,17.825 -61.425,-88.225 -54.65,-95 -54.425,-94.775 70.875,-94.775
GND on Bottom Layer "GND_L04_P031" (solid, pour order 31): -53.425,30.475 -51.575,28.625 -51.575,-75.4 -43.45,-83.525 48.875,-83.525 64.4,-68 64.4,32.425 58.1,38.725 54.15,34.775 -53.55,34.775 -53.55,28.15 -53.425,28.025

## Silkscreen, mask and mechanical layers (free items; w line width, h text height)
Top Overlay:
  lines w0.15: -35.459,-18.5 cw(c-31.208,-18.5) -31.208,-14.249 ; -33.941,-21.756 ccw(c-31.208,-18.5) -31.208,-22.751 ; -32.336,-59.081 ccw(c-28.65,-56.5) -24.15,-56.5 -24.15,-55.25 -21.998,-55.25 ccw(c-21.998,-53.5) -20.483,-54.375 cw(c-19.4,-55) -19.4,-53.75 -8.9,-53.75 ccw(c-8.9,-52) -7.15,-52 -7.15,-43 ccw(c-8.9,-43) -8.9,-41.25 -19.4,-41.25 cw(c-19.4,-40) -20.483,-40.625 ccw(c-21.998,-41.5) -21.998,-39.75 -24.15,-39.75 -24.15,-38.5 ccw(c-28.65,-38.5) -32.336,-35.919 ; -31.236,-22.75 -28.25,-22.75 cw(c-28.25,-24.5) -26.5,-24.5 -26.5,-25.9 ccw(c-24.25,-25.9) -24.25,-28.15 -15.724,-28.15 cw(c-15.724,-29.9) -14.149,-29.135 14.149,-29.135 cw(c15.724,-29.9) 15.724,-28.15 24.25,-28.15 ccw(c24.25,-25.9) 26.5,-25.9 26.5,-24.5 cw(c28.25,-24.5) 28.25,-22.75 31.236,-22.75 ; -31.236,-14.25 -28.25,-14.25 ccw(c-28.25,-12.5) -26.5,-12.5 -26.5,-11.1 cw(c-24.25,-11.1) -24.25,-8.85 -15.724,-8.85 ccw(c-15.724,-7.1) -14.149,-7.865 14.149,-7.865 ccw(c15.724,-7.1) 15.724,-8.85 24.25,-8.85 cw(c24.25,-11.1) 26.5,-11.1 26.5,-12.5 ccw(c28.25,-12.5) 28.25,-14.25 31.236,-14.25 ; -6.101,-3.665 ccw(c-7.351,-8.33) -7.351,-3.5 -14,-3.5 cw(c-14,0) -14,3.5 -7.351,3.5 ccw(c-7.351,8.33) -6.101,3.665 ; 0,7.5 0,16.5 ; 6.101,-3.665 cw(c7.351,-8.33) 7.351,-3.5 14,-3.5 ccw(c14,0) 14,3.5 7.351,3.5 cw(c7.351,8.33) 6.101,3.665 ; 31.208,-22.751 ccw(c31.208,-18.5) 33.941,-21.756 ; 31.208,-14.25 cw(c31.208,-18.5) 35.458,-18.5 ; 32.336,-59.081 cw(c28.65,-56.5) 24.15,-56.5 24.15,-55.25 21.998,-55.25 cw(c21.998,-53.5) 20.483,-54.375 ccw(c19.4,-55) 19.4,-53.75 8.9,-53.75 cw(c8.9,-52) 7.15,-52 7.15,-43 cw(c8.9,-43) 8.9,-41.25 19.4,-41.25 ccw(c19.4,-40) 20.483,-40.625 cw(c21.998,-41.5) 21.998,-39.75 24.15,-39.75 24.15,-38.5 cw(c28.65,-38.5) 32.336,-35.919
  text "S4" at -20.7,8.05 h2
  text "S3" at 17.55,8.05 h2
  text "S5" at -35.175,-9.3 h2
  text "S2" at 30.95,-9.7 h2
  text "S1" at 37.05,-16.7 h2
  text "S6" at -39.4,-18.7 h2
  text "DIP1" at -7.496,-66.746 h1.5
  text "DIP2" at -7.496,-68.996 h1.5
  text "DIP3" at -7.496,-71.246 h1.5
Bottom Overlay:
  drawing of 5 lines, arcs and shapes, not listed
  text "Micromouse PCB" at -4.704,-20.621 h1.1
  text "v1.0.0" at -4.779,-22.621 h1.1
  text "Authors:" at -4.804,-24.671 h1.1
  text "DM & AA" at -4.854,-26.571 h1.1
Mechanical 1:
  drawing of 226 lines, arcs and shapes, not listed
Mechanical 13:
  lines w0.254: 0,-56 0,-7.865

## Text inside footprints (layer, text, board x,y; h text height)
C17: Top Overlay "+" at -7.2,-40.3 h1.22 r270
C18: Top Overlay "+" at 6.4,-40.4 h1.22 r270
D7: Mechanical 13 "+" at -2.358,-63.142 h0.5